# EAGLE board SmartLEDShield_ESP32_THT_V0 (EAGLE 8.6.3)
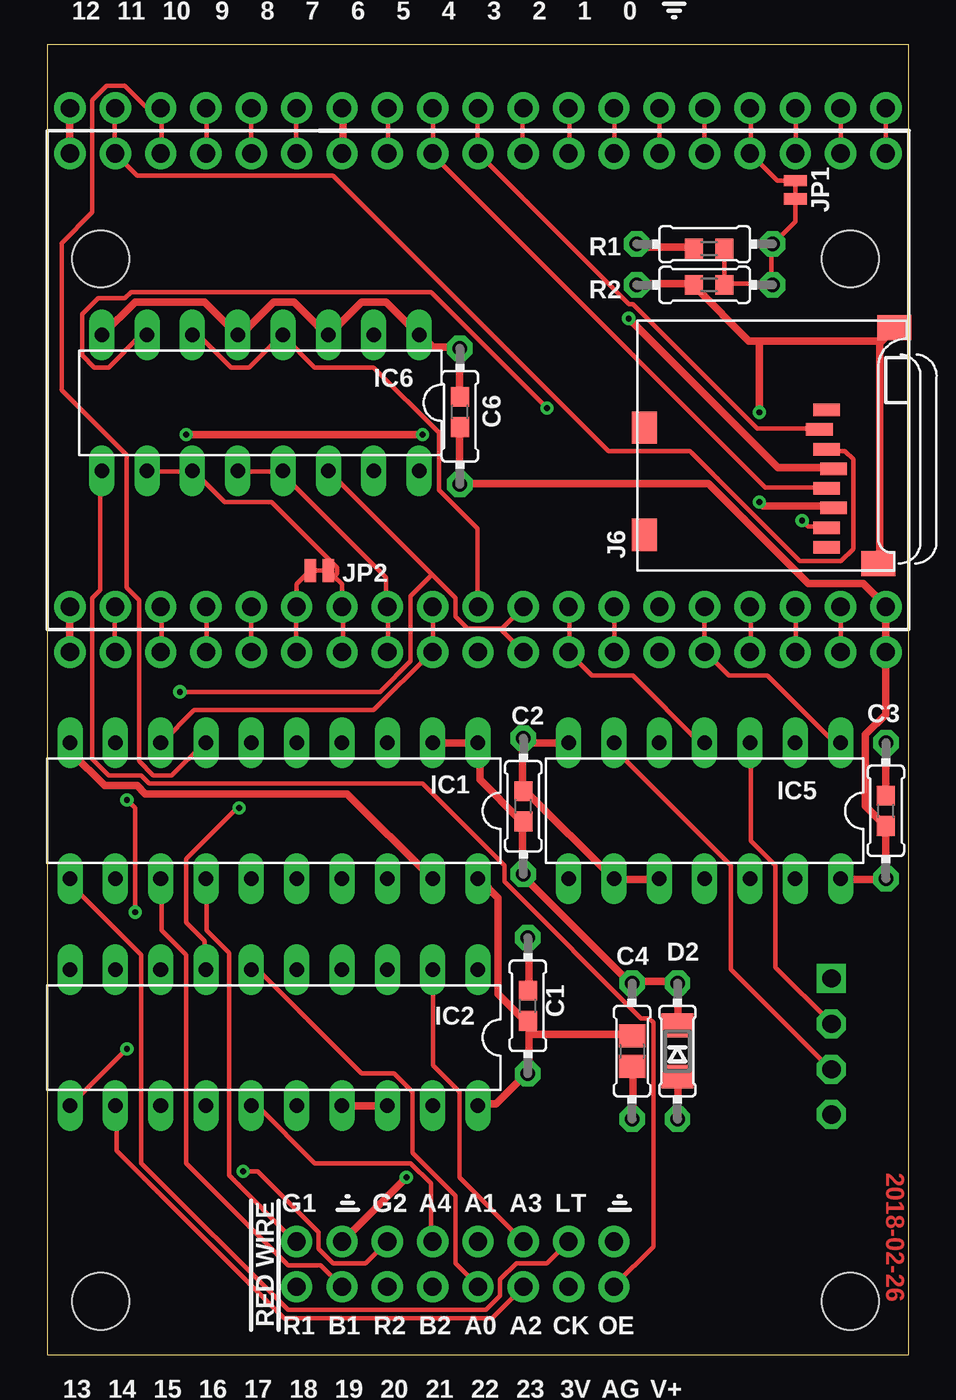
[diagram p0: board, top side]
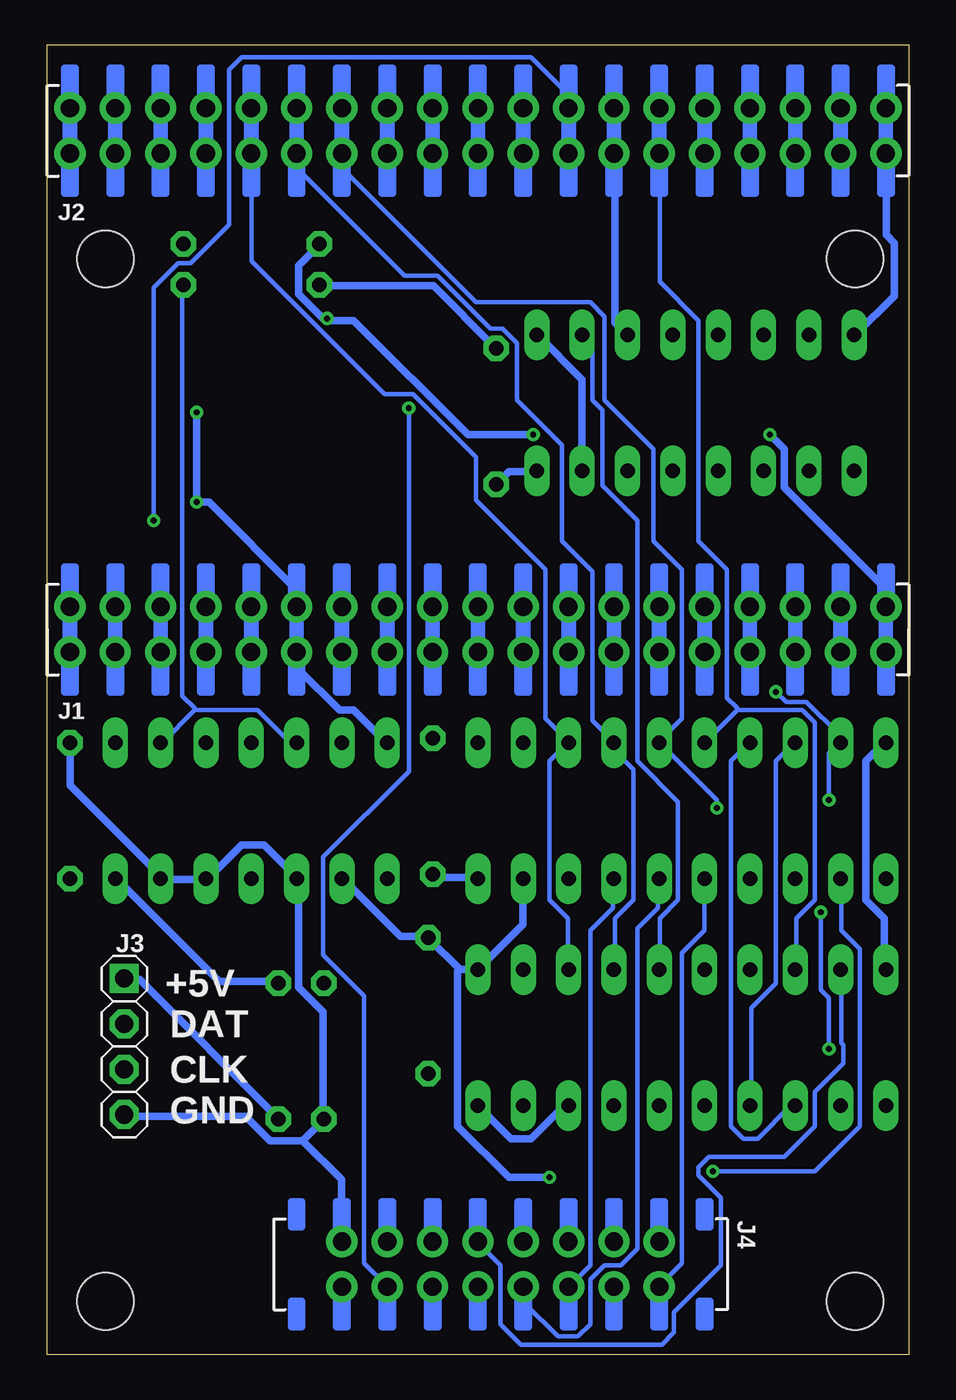
[diagram p1: board, bottom side, seen from below]

Size 48.26 x 73.41 mm. Coordinates in mm from the lower left corner, seen from the top.
Outline: 0,0 48.26,0 48.26,73.41 0,73.41 0,0
Copper layers (1*16): Top 0.0356mm / dielectric 1.5011mm / Bottom 0.0356mm
Design rules "OshParkMod-8mil-20150316": minimum track width 6mil, minimum drill 13mil, track to track 8mil, track to pad 8mil, pad to pad 8mil, via to via 8mil, smd to smd 8mil, copper to edge 15mil, drill to drill 6mil, minimum pad ring 12mil, minimum via ring 8mil, stop-mask expansion 3mil, vias tented up to drill 25mil, thermal gap 10mil
Net classes: 0 default: width 0.254 mm; 1 power: width 0.406 mm

## Footprints (pad centres in the part's own frame; a part is rotated, then mirrored left to right if it is on the bottom)
C0603 = smd 1.1 x 1: 1 -0.85,0; 2 0.85,0
0204/7 = drill 0.813 octagon: 1 -3.81,0; 2 3.81,0
C0805 = smd 1.3 x 1.5: 1 -0.85,0; 2 0.85,0
SOD123-FL = smd 1.34 x 1.8: A 1.43,0; C -1.43,0
STAND-OFF-3MM = hole 3.2: 0,0
DIL20 = drill 0.813 long: 1 -11.43,-3.81; 2 -8.89,-3.81; 3 -6.35,-3.81; 4 -3.81,-3.81; 5 -1.27,-3.81; 6 1.27,-3.81; 7 3.81,-3.81; 8 6.35,-3.81; 9 8.89,-3.81; 10 11.43,-3.81; 11 11.43,3.81; 12 8.89,3.81; 13 6.35,3.81; 14 3.81,3.81; 15 1.27,3.81; 16 -1.27,3.81; 17 -3.81,3.81; 18 -6.35,3.81; 19 -8.89,3.81; 20 -11.43,3.81
DIL14 = drill 0.813 long: 1 -7.62,-3.81; 2 -5.08,-3.81; 3 -2.54,-3.81; 4 0,-3.81; 5 2.54,-3.81; 6 5.08,-3.81; 7 7.62,-3.81; 8 7.62,3.81; 9 5.08,3.81; 10 2.54,3.81; 11 0,3.81; 12 -2.54,3.81; 13 -5.08,3.81; 14 -7.62,3.81
DIL16 = drill 0.813 long: 1 -8.89,-3.81; 2 -6.35,-3.81; 3 -3.81,-3.81; 4 -1.27,-3.81; 5 1.27,-3.81; 6 3.81,-3.81; 7 6.35,-3.81; 8 8.89,-3.81; 9 8.89,3.81; 10 6.35,3.81; 11 3.81,3.81; 12 1.27,3.81; 13 -1.27,3.81; 14 -3.81,3.81; 15 -6.35,3.81; 16 -8.89,3.81
ESP32_DEVC_DUAL_HEADER_BOT_MOUNT_RIGHT = drill 1.016 pad 1.753: 3V3A -1.27,-24.13; 3V3B 1.27,-24.13; 5V_A -1.27,21.59; 5V_B 1.27,21.59; 12A -1.27,6.35; 12B 1.27,6.35; 13A_A -1.27,11.43; 13B_B 1.27,11.43; 14A_A -1.27,3.81; 14B_B 1.27,3.81; 25A -1.27,-3.81; 25B 1.27,-3.81; 26A -1.27,-1.27; 26B 1.27,-1.27; 27A -1.27,1.27; 27B 1.27,1.27; 32A -1.27,-8.89; 32B 1.27,-8.89; 33A -1.27,-6.35; 33B 1.27,-6.35; 34A -1.27,-13.97; 34B 1.27,-13.97; 35A -1.27,-11.43; 35B 1.27,-11.43; CMD_A -1.27,19.05; CMD_B 1.27,19.05; D2A -1.27,13.97; D2B 1.27,13.97; D3_A -1.27,16.51; D3_B 1.27,16.51; ENA -1.27,-21.59; ENB 1.27,-21.59; GNDA -1.27,8.89; GNDB 1.27,8.89; VNA -1.27,-16.51; VNB 1.27,-16.51; VPA -1.27,-19.05; VPB 1.27,-19.05
ESP32_DEVC_DUAL_HEADER_BOT_MOUNT_LEFT = drill 1.016 pad 1.753: 0A 1.27,8.89; 0B -1.27,8.89; 2A 1.27,11.43; 2B -1.27,11.43; 4A 1.27,6.35; 4B -1.27,6.35; 5A 1.27,-1.27; 5B -1.27,-1.27; 15A_A 1.27,13.97; 15B_B -1.27,13.97; 16_B -1.27,3.81; 16A_A 1.27,3.81; 17A_A 1.27,1.27; 17B_B -1.27,1.27; 18A_A 1.27,-3.81; 18B_B -1.27,-3.81; 19A_A 1.27,-6.35; 19B_B -1.27,-6.35; 21A 1.27,-11.43; 21B -1.27,-11.43; 22A 1.27,-19.05; 22B -1.27,-19.05; 23A 1.27,-21.59; 23B -1.27,-21.59; CLKA 1.27,21.59; CLKB -1.27,21.59; D0A 1.27,19.05; D0B -1.27,19.05; D1A 1.27,16.51; D1B -1.27,16.51; GND1A 1.27,-24.13; GND1B -1.27,-24.13; GNDA 1.27,-8.89; GNDB -1.27,-8.89; RXA 1.27,-13.97; RXB -1.27,-13.97; TXA 1.27,-16.51; TXB -1.27,-16.51
1X04-S = drill 1.016 square: 1 -3.81,0 | drill 1.016 octagon: 2 -1.27,0; 3 1.27,0; 4 3.81,0
SMARTMATRIX_SSMTHT = drill 1.016 pad 1.753: 1 1.27,8.89; 2 -1.27,8.89; 3 1.27,6.35; 4 -1.27,6.35; 5 1.27,3.81; 6 -1.27,3.81; 7 1.27,1.27; 8 -1.27,1.27; 9 1.27,-1.27; 10 -1.27,-1.27; 11 1.27,-3.81; 12 -1.27,-3.81; 13 1.27,-6.35; 14 -1.27,-6.35; 15 1.27,-8.89; 16 -1.27,-8.89
MICROSD = smd 0.7 x 1.5: 1 9,-10.64; 2 7.9,-10.24; 3 6.8,-10.64; 4 5.7,-11.04; 5 4.6,-10.64; 6 3.5,-11.04; 7 2.4,-10.64; 8 1.3,-10.64 | smd 1.8 x 1.4: CD1 2,-0.44; CD2 8,-0.44 | smd 1.4 x 1.9: MT1 0.4,-13.54; MT2 13.6,-14.44
SMT-JUMPER_2_NC_TRACE_NO-SILK = smd 0.635 x 1.27: 1 -0.508,0; 2 0.508,0
R0603 = smd 1 x 1.1: 1 -0.85,0; 2 0.85,0

## Placement (x,y rotation side)
C1  0.1uF  [C0603]  26.92,19.56 90 top
C1-THT  47k  [0204/7]  26.92,19.56 90 top
C2  0.1uF  [C0603]  26.67,30.73 90 top
C2-THT  47k  [0204/7]  26.67,30.73 90 top
C3  0.1uF  [C0603]  46.99,30.48 90 top
C3-THT  47k  [0204/7]  46.99,30.48 90 top
C4  10uF  [C0805]  32.77,17.02 270 top
C4-THT  47k  [0204/7]  32.77,17.02 90 top
C6  0.1uF  [C0603]  23.11,52.83 90 top
C6-THT  47k  [0204/7]  23.11,52.58 90 top
D2  MBR1020VL  [SOD123-FL]  35.31,17.02 270 top
D2-THT  47k  [0204/7]  35.31,17.02 270 top
H1  STAND-OFFSTAND-OFF-3MM  [STAND-OFF-3MM]  45,61.4 90 top
H3  STAND-OFFSTAND-OFF-3MM  [STAND-OFF-3MM]  3,61.4 90 top
H6  STAND-OFFSTAND-OFF-3MM  [STAND-OFF-3MM]  3,3 270 top
H9  STAND-OFFSTAND-OFF-3MM  [STAND-OFF-3MM]  45,3 0 top
IC1  74LS245N  [DIL20]  12.7,30.48 180 top
IC2  74S373N  [DIL20]  12.7,17.78 180 top
IC5  74ALS08N  [DIL14]  36.83,30.48 180 top
IC6  74S253N  [DIL16]  11.94,53.34 180 top
J1  ESP32_DEVC_MIN_RIGHT  [ESP32_DEVC_DUAL_HEADER_BOT_MOUNT_RIGHT]  25.4,40.64 90 bottom
J2  ESP32_DEVC_MIN_LEFT  [ESP32_DEVC_DUAL_HEADER_BOT_MOUNT_LEFT]  25.4,68.58 90 bottom
J3  [1X04-S]  43.94,17.27 270 bottom
J4  [SMARTMATRIX_SSMTHT]  22.86,5.08 270 bottom
J6  MICROSD  [MICROSD]  33.02,43.94 90 top
JP1  JUMPER-SMT_2_NC_TRACE_NO-SILK  [SMT-JUMPER_2_NC_TRACE_NO-SILK]  41.91,65.28 270 top
JP2  JUMPER-SMT_2_NC_TRACE_NO-SILK  [SMT-JUMPER_2_NC_TRACE_NO-SILK]  15.24,43.94 180 top
R1  47k-DNP  [R0603]  37.08,61.98 0 top
R1-THT  47k-DNP  [0204/7]  36.83,62.23 0 top
R2  47k  [R0603]  37.08,59.94 180 top
R2-THT  47k  [0204/7]  36.83,59.94 180 top

## Library data of the parts
C1-C4 C6 = scanlime; PARTNO: CAP CER 0.1UF 10V 10% X7R 0805
C1-THT C2-THT C3-THT C4-THT C6-THT D2-THT R1 R1-THT R2 R2-THT = rcl
D2 H1 H3 H6 H9 IC1 IC2 J1-J4 = eclibrary
IC5 IC6 = 74xx-us
J6 = adafruit; PARTNO: 101-00660-68-6
JP1 JP2 = SparkFun-Jumpers

## Nets
3V3 [power]: J1.3V3A J1.3V3B J6.4 R1-THT.1 R1.1
APA_MISO: J1.12A J1.12B
APA_MOSI: IC5.1 J1.13A_A J1.13B_B
APA_SCK: IC5.4 J1.14A_A J1.14B_B
BUFFER_B1: IC1.7 IC2.13 J2.22A J2.22B
BUFFER_B2: IC1.4 IC2.4 J2.0A J2.0B
BUFFER_CLK: IC6.4 IC6.6 J1.26A J1.26B
BUFFER_G1: IC1.6 IC2.8 J2.21A J2.21B
BUFFER_G2: IC1.8 IC2.14 J1.25A J1.25B
BUFFER_LATCH: IC1.9 IC2.11 IC6.14 J1.27A J1.27B
BUFFER_R1: IC1.5 IC2.7 J2.4A J2.4B
BUFFER_R2: IC1.3 IC2.3 J2.2A J2.2B
CLK1: IC5.6 J3.3
DAT1: IC5.3 J3.2
GND [power]: C1-THT.2 C1.2 C2-THT.2 C2.2 C3-THT.2 C3.2 C4-THT.1 C4.2 C6-THT.2 C6.2 IC1.10 IC1.19 IC2.1 IC2.10 IC5.7 IC5.9 IC5.10 IC5.12 IC5.13 IC6.1 IC6.3 IC6.5 IC6.8 IC6.15 J1.GNDA J1.GNDB J2.GND1A J2.GND1B J2.GNDA J2.GNDB J3.4 J4.4 J4.16 J6.6 J6.MT1 J6.MT2 R2-THT.2 R2.2
LED_EN: J2.15A_A J2.15B_B JP1.1
N$1: J1.35A J1.35B JP2.2
N$2: J1.CMD_A J1.CMD_B
N$3: J1.D3_A J1.D3_B
N$4: IC5.2 IC5.5 JP1.2 R1-THT.2 R1.2 R2-THT.1 R2.1
N$5: J1.D2A J1.D2B
N$6: J2.CLKA J2.CLKB
N$7: J2.D0A J2.D0B
N$8: J2.D1A J2.D1B
N$9: J1.VNA J1.VNB
N$10: J1.VPA J1.VPB
N$11: J1.34A J1.34B
N$13: J1.ENA J1.ENB
N$14: J2.TXA J2.TXB
N$15: J2.RXA J2.RXB
N$16: J2.17A_A J2.17B_B
N$17: J2.16_B J2.16A_A
OE_DMA: IC6.10 IC6.11 J1.32A J1.32B JP2.1
OE_PWM: IC6.12 IC6.13 J1.33A J1.33B
OE_SWITCH: IC2.5 IC6.2
PANEL_ADX0: IC2.6 J4.9
PANEL_ADX1: IC2.9 J4.10
PANEL_ADX2: IC2.12 J4.11
PANEL_ADX3: IC2.2 J4.12
PANEL_ADX4: IC2.15 J4.8
PANEL_B1: IC1.13 J4.3
PANEL_B2: IC1.16 J4.7
PANEL_CLK: IC6.7 J4.13
PANEL_G1: IC1.14 J4.2
PANEL_G2: IC1.12 J4.6
PANEL_LATCH: IC1.11 J4.14
PANEL_OE: IC6.9 J4.15
PANEL_R1: IC1.15 J4.1
PANEL_R2: IC1.17 J4.5
SD_CS: J2.5A J2.5B J6.2
SD_MISO: J2.19A_A J2.19B_B J6.7
SD_MOSI: J2.23A J2.23B J6.3
SD_SCK: J2.18A_A J2.18B_B J6.5
VEXT [power]: D2-THT.2 D2.A J3.1
VIN [power]: C1-THT.1 C1.1 C2-THT.1 C2.1 C3-THT.1 C3.1 C4-THT.2 C4.1 C6-THT.1 C6.1 D2-THT.1 D2.C IC1.1 IC1.2 IC1.20 IC2.17 IC2.18 IC2.20 IC5.14 IC6.16 J1.5V_A J1.5V_B

## Tracks (layer width: path | path; a pad name or v marks a point on that pad's centre or on a via)
3V3  (via drill 0.33)
  Top 0.406: J1.3V3B 1.26,41.83 1.26,39.43 J1.3V3A | R1.1 36.23,62.06 33.15,62.06 33.03,62.18 R1-THT.1 | v32.58,58.06 40.92,49.72 44.01,49.72 J6.4 | v21.03,51.55 v7.77,51.55
  Bottom 0.406: R1-THT.1 33.03,62.18 34.18,61.04 34.18,59.44 32.8,58.06 v32.58,58.06 32.46,57.95 31.09,57.95 24.69,51.55 v21.03,51.55 | v7.77,51.55 6.97,50.75 6.97,48.58 1.37,42.98 1.37,41.95 J1.3V3B
APA_MISO
  Top 0.254: J1.12B 31.77,41.83 31.77,39.43 J1.12A
APA_MOSI
  Top 0.254: IC5.1 44.12,34.29 40.35,38.06 38.18,38.06 36.92,39.32 J1.13A_A 36.8,39.43 36.8,41.83 J1.13B_B
APA_SCK
  Top 0.254: IC5.4 36.58,34.29 32.8,38.06 30.52,38.06 J1.14A_A 29.26,39.43 29.26,41.83 J1.14B_B
BUFFER_B1
  Top 0.254: J2.22B 6.4,67.32 6.4,69.84 J2.22A 6.29,69.95 5.49,69.95 4.34,71.09 3.31,71.09 2.52,70.29 2.52,64.01 0.8,62.29 0.8,54.06 4.46,50.41 4.46,42.98 5.14,42.29 5.14,33.26 5.94,32.46 6.97,32.46 8.8,34.29 IC1.7
  Bottom 0.254: IC2.13 6.4,13.95 6.63,13.95 8.46,12.12 9.26,12.12 9.94,12.8 9.94,33.26 8.91,34.29 IC1.7
BUFFER_B2
  Top 0.254: J2.0B J2.0A
  Bottom 0.254: IC2.4 16.46,21.6 16.46,24.46 15.43,25.49 15.43,32.8 16.46,33.83 16.46,34.29 IC1.4 16.57,34.4 17.72,35.55 17.72,43.89 19.43,45.61 19.43,50.98 21.95,53.49 21.95,56.69 22.75,57.49 23.43,57.49 26.4,60.47 28.23,60.47 34.29,66.52 J2.0B
BUFFER_CLK
  Top 0.254: IC6.6 8.46,57.15 10.29,55.32 11.32,55.32 13.14,57.15 IC6.4 13.26,57.04 14.97,55.32 18.29,55.32 21.95,51.66 21.95,48.46 24.12,46.29 24.12,41.95 J1.26B
  Bottom 0.254: J1.26B 24.12,41.83 24.12,39.43 J1.26A
BUFFER_G1
  Top 0.254: J2.21A 13.95,69.84 13.95,67.32 J2.21B
  Bottom 0.254: 9.6,36.12 5.94,36.12 5.26,35.43 5.26,25.49 6.29,24.46 6.29,21.6 IC2.8 | IC1.6 9.6,36.12 | J2.21B 13.95,67.21 13.95,60.12 11.77,57.95 11.77,45.61 10.17,44.01 10.17,36.8 9.6,36.23 9.6,36.12
BUFFER_G2
  Top 0.254: J1.25B 21.6,41.83 21.6,39.43 J1.25A 21.49,39.32 18.29,36.12 8.23,36.12 6.4,34.29 IC1.8
  Bottom 0.254: IC2.14 8.8,14.06 8.8,19.43 7.43,20.8 7.43,33.26 6.4,34.29 IC1.8
BUFFER_LATCH  (via drill 0.33)
  Top 0.254: 21.55,43.72 22.86,42.41 22.86,41.38 23.55,40.69 25.49,40.69 | 21.55,43.72 15.77,49.49 IC6.14 | 25.49,40.69 26.63,41.83 J1.27B | J1.27A 26.63,39.43 25.49,40.58 25.49,40.69 | v4.46,17.14 1.37,14.06 IC2.11 | v4.92,24.8 4.92,30.63 v4.46,31.09 | 21.55,43.72 20.34,42.52 20.34,38.86 18.63,37.15 v7.43,37.15
  Bottom 0.254: v4.46,17.14 4.46,20 4.92,20.46 v4.92,24.8 | v4.46,31.09 4.46,33.72 3.89,34.29 IC1.9 3.89,34.4 3.89,34.75 5.71,36.58 6.86,36.58 v7.43,37.15
BUFFER_R1  (via drill 0.33)
  Top 0.254: J2.4A 31.77,69.84 31.77,67.32 J2.4B | v10.74,30.63 10.63,30.63 7.77,27.77 7.77,24.23 8.8,23.2 8.8,21.6 IC2.7
  Bottom 0.254: v10.74,30.63 10.74,31.09 13.95,34.29 IC1.5 13.95,34.4 12.69,35.66 12.69,44.01 14.29,45.61 14.29,50.75 17.03,53.49 17.03,58.18 17.83,58.98 24.23,58.98 31.66,66.41 31.66,67.21 J2.4B
BUFFER_R2
  Top 0.254: J2.2A 36.8,69.84 36.8,67.32 J2.2B
  Bottom 0.254: IC2.3 19.09,21.6 19.09,24.46 20.12,25.49 20.12,33.26 19.09,34.29 IC1.3 19.09,34.4 20.34,35.66 20.34,44.01 24.23,47.89 24.23,50.29 27.77,53.84 29.38,53.84 36.8,61.27 36.8,67.21 J2.2B
CLK1
  Top 0.254: IC5.6 31.77,34.29 31.77,33.95 38.29,27.43 38.29,21.6 43.89,16 J3.3
DAT1
  Top 0.254: IC5.3 39.43,34.29 39.43,28.8 40.8,27.43 40.8,21.72 43.89,18.63 J3.2
GND  (via drill 0.33)
  Top 0.406: J2.GNDA 16.57,69.84 16.57,67.32 J2.GNDB | J2.GND1A 1.26,69.84 1.26,67.32 J2.GND1B | IC6.8 3.09,57.15 4.92,58.98 8.8,58.98 10.63,57.15 IC6.5 10.86,57.15 12.69,58.98 13.83,58.98 15.66,57.15 IC6.3 15.89,57.26 17.6,58.98 18.97,58.98 20.69,57.26 IC6.1 20.92,57.15 21.6,56.46 22.97,56.46 C6-THT.2 23.09,56.35 23.09,53.72 C6.2 | 46.63,56.69 46.63,44.35 J6.MT1 | 46.63,56.69 47.43,57.49 J6.MT2 | R2-THT.2 33.03,60.01 36.23,60.01 R2.2 36.35,59.78 39.32,56.81 39.89,56.81 | 39.89,56.81 46.52,56.81 46.63,56.69 | C4.2 32.8,16.12 32.8,13.26 C4-THT.1 | C3.2 46.98,31.43 46.98,34.29 C3-THT.2 | v39.89,47.78 40.12,47.55 44.01,47.55 J6.6 | IC5.7 26.75,34.29 C2-THT.2 26.63,34.52 26.63,31.66 C2.2 26.86,31.55 31.66,26.75 IC5.9 31.77,26.63 34.29,26.63 IC5.10 | C1.2 26.98,20.46 26.98,23.32 C1-THT.2 | v20.12,9.94 16.57,6.4 J4.4 | IC1.10 1.37,34.29 1.37,33.72 3.2,31.89 5.03,31.89 5.49,31.43 16.8,31.43 21.49,26.75 IC1.19 | v39.89,52.81 39.89,56.81
  Bottom 0.406: J2.GND1B 1.26,67.21 1.26,62.75 0.8,62.29 0.8,59.32 2.97,57.15 IC6.8 | J2.GNDB 16.46,67.21 16.46,57.84 15.77,57.15 IC6.3 | IC6.15 18.29,54.63 20.8,57.15 IC6.1 | R2-THT.2 32.92,59.89 26.63,59.89 23.2,56.46 C6-THT.2 | 33.95,12 35.78,12 37.15,13.37 43.89,13.37 J3.4 | 33.95,12 32.8,13.14 C4-THT.1 32.8,13.37 32.8,19.2 34.18,20.57 34.18,26.52 IC5.10 34.29,26.75 36.12,28.57 37.38,28.57 39.2,26.75 IC5.12 39.43,26.63 41.83,26.63 IC5.13 41.95,26.86 46.98,31.89 46.98,34.29 C3-THT.2 | 33.95,12 31.77,9.83 31.77,6.4 J4.16 | IC2.10 1.37,21.6 1.37,24.46 2.4,25.49 2.4,33.26 1.37,34.29 IC1.10 | 25.15,21.6 24.23,21.6 IC2.1 21.6,24.12 21.6,26.63 IC1.19 | 25.15,21.6 26.86,23.32 C1-THT.2 27.09,23.43 28.46,23.43 31.66,26.63 IC5.9 | v20.12,9.94 22.4,9.94 25.26,12.8 25.26,21.49 25.15,21.6 | IC5.7 29.26,34.29 31.09,36.12 31.89,36.12 34.18,38.41 34.18,39.2 J1.GNDA J1.GNDB 34.29,42.86 39.2,47.78 v39.89,47.78 v39.89,52.81
LED_EN
  Top 0.254: JP1.1 40.89,65.79 J2.15B_B 39.43,67.32 39.43,69.84 J2.15A_A
N$1
  Top 0.254: JP2.2 13.97,43.18 J1.35B 13.95,41.83 13.95,39.43 J1.35A
N$2
  Top 0.254: J1.CMD_B 44.46,41.83 44.46,39.43 J1.CMD_A
N$3
  Top 0.254: J1.D3_B 41.95,41.83 41.95,39.43 J1.D3_A
N$4
  Top 0.254: JP1.2 41.91,63.5 R1-THT.2 40.58,62.18 40.58,60.12 R2-THT.1 40.58,60.01 38.06,60.01 R2.1 37.95,60.01 37.95,61.95 R1.2
  Bottom 0.254: IC5.5 34.63,34.29 36.46,36.12 40.01,36.12 | 40.01,36.12 41.83,34.29 IC5.2 | R2-THT.1 40.69,59.89 40.69,36.92 40.01,36.23 40.01,36.12
N$5
  Top 0.254: J1.D2B 39.43,41.83 39.43,39.43 J1.D2A
N$6
  Top 0.254: J2.CLKA 46.98,69.84 46.98,67.32 J2.CLKB
N$7
  Top 0.254: J2.D0A 44.46,69.84 44.46,67.32 J2.D0B
N$8
  Top 0.254: J2.D1A 41.95,69.84 41.95,67.32 J2.D1B
N$9
  Top 0.254: J1.VNB 8.91,41.83 8.91,39.43 J1.VNA
N$10
  Top 0.254: J1.VPB 6.4,41.83 6.4,39.43 J1.VPA
N$11
  Top 0.254: J1.34A J1.34B
N$13
  Top 0.254: J1.ENB 3.77,41.83 3.77,39.43 J1.ENA
N$14
  Top 0.254: J2.TXA 8.91,69.84 8.91,67.32 J2.TXB
N$15
  Top 0.254: J2.RXB J2.RXA
N$16
  Top 0.254: J2.17A_A 26.63,69.84 26.63,67.32 J2.17B_B
N$17
  Top 0.254: J2.16A_A 29.26,69.84 29.26,67.32 J2.16_B
OE_DMA
  Top 0.254: JP2.1 16.07,43.62 | 16.07,43.62 16.51,43.18 J1.32B 16.57,41.83 16.57,39.43 J1.32A | IC6.10 5.6,49.49 8.12,49.49 IC6.11 8.23,49.49 9.94,47.78 12.57,47.78 16.23,44.12 16.23,43.78 16.07,43.62
OE_PWM
  Top 0.254: J1.33A 19.09,39.43 19.09,41.83 J1.33B 18.97,41.95 18.97,43.55 13.14,49.38 IC6.13 13.14,49.49 10.74,49.49 IC6.12
OE_SWITCH
  Bottom 0.254: IC6.2 17.72,56.58 17.72,53.49 17.14,52.92 17.14,48.69 15.2,46.75 15.2,33.26 12.92,30.98 12.92,25.49 13.95,24.46 13.95,21.6 IC2.5
PANEL_ADX0
  Top 0.254: IC2.6 11.43,21.49 11.89,21.49 17.6,15.77 19.43,15.77 20.46,14.74 20.46,11.32 22.86,8.91 22.86,5.14 24.12,3.89 J4.9
PANEL_ADX1
  Bottom 0.254: IC2.9 3.77,21.49 3.77,17.49 3.66,17.37 3.66,16.34 5.26,14.74 5.26,12.8 6.97,11.09 11.2,11.09 11.77,10.52 11.77,10.06 10.52,8.8 10.52,5.03 13.14,2.4 13.14,1.26 13.83,0.57 21.72,0.57 22.86,1.71 22.86,5.03 24.12,6.29 J4.10
PANEL_ADX2
  Top 0.254: J4.11 24.92,2.06 13.26,2.06 3.89,11.43 3.89,13.95 IC2.12
PANEL_ADX3
  Top 0.254: IC2.2 21.6,21.49 21.6,16.23 23.09,14.74 23.09,9.94 26.63,6.4 J4.12
PANEL_ADX4
  Top 0.254: IC2.15 11.43,13.95 11.77,13.95 14.97,10.74 20.34,10.74 21.49,9.6 21.49,6.4 J4.8
PANEL_B1
  Top 0.254: IC1.13 6.4,26.63 6.4,23.77 7.77,22.4 7.77,10.74 13.49,5.03 15.32,5.03 16.46,3.89 J4.3
PANEL_B2
  Bottom 0.254: IC1.16 14.06,26.63 14.06,25.03 15.2,23.89 15.2,5.94 16.12,5.03 17.03,5.03 17.83,4.23 17.83,1.71 18.52,1.03 19.66,1.03 21.49,2.86 21.49,3.77 J4.7
PANEL_CLK  (via drill 0.33)
  Top 0.254: IC6.7 5.26,57.15 3.43,55.32 2.63,55.32 1.94,56.01 1.94,58.29 2.86,59.21 4.34,59.21 4.69,59.55 21.49,59.55 v28,53.03
  Bottom 0.254: v28,53.03 28,32.69 32.8,27.89 32.8,22.4 30.52,20.12 30.52,5.14 29.26,3.89 J4.13
PANEL_G1
  Top 0.254: IC1.14 8.91,26.63 8.91,23.77 10.17,22.52 10.17,10.06 13.95,6.29 J4.2
PANEL_G2  (via drill 0.33)
  Top 0.254: v10.97,10.29 11.77,10.29 15.2,6.86 15.2,5.94 16,5.14 17.83,5.14 18.97,6.29 J4.6
  Bottom 0.254: v10.97,10.29 5.26,10.29 2.74,12.8 2.74,22.75 3.77,23.77 3.77,26.63 IC1.12
PANEL_LATCH
  Top 0.254: J4.14 28,5.14 26.29,5.14 25.38,4.23 25.38,3.31 24.57,2.52 13.49,2.52 5.26,10.74 5.26,22.4 1.37,26.29 1.37,26.63 IC1.11
PANEL_OE
  Top 0.254: IC6.9 2.97,49.49 2.97,42.86 2.52,42.41 2.52,33.38 3.43,32.46 5.26,32.46 5.71,32 21.03,32 25.6,27.43 25.6,26.52 33.26,18.86 33.72,18.86 33.95,18.63 33.95,6.06 31.77,3.89 J4.15
PANEL_R1
  Bottom 0.254: IC1.15 11.43,23.77 12.69,22.52 12.69,5.14 13.95,3.89 J4.1
PANEL_R2
  Bottom 0.254: J4.5 17.83,5.03 17.83,23.77 16.57,25.03 16.57,26.63 IC1.17
SD_CS
  Top 0.254: J6.2 43.2,51.89 39.78,51.89 32.8,58.86 32.58,58.86 J2.5B 24.12,67.32 24.12,69.84 J2.5A
SD_MISO  (via drill 0.33)
  Top 0.254: v42.29,46.75 42.63,46.41 43.55,46.41 J6.7 | J2.19B_B 19.09,67.32 19.09,69.84 J2.19A_A
  Bottom 0.254: v42.29,46.75 42.29,59.78 40.92,61.15 40.23,61.15 38.06,63.32 38.06,72.01 37.38,72.69 21.14,72.69 19.09,70.64 19.09,69.95 J2.19A_A
SD_MOSI
  Top 0.254: J6.3 43.66,50.63 44.69,50.63 45.15,50.18 45.15,45.15 44.46,44.46 42.18,44.46 36.01,50.63 31.43,50.63 16,66.06 5.03,66.06 3.89,67.21 J2.23B 3.77,67.44 3.77,69.84 J2.23A
SD_SCK
  Top 0.254: J6.5 43.55,48.58 40.23,48.58 21.6,67.21 J2.18B_B 21.6,67.44 21.6,69.84 J2.18A_A
VEXT
  Top 0.406: D2.A 35.32,15.54 35.32,13.26 D2-THT.2
  Bottom 0.406: J3.1 43.89,21.03 43.09,21.03 35.32,13.26 D2-THT.2
VIN
  Top 0.406: IC2.17 16.57,13.95 18.97,13.95 IC2.18 | 26.98,17.95 26.98,15.77 C1-THT.1 26.75,15.66 25.15,14.06 24.23,14.06 IC2.20 | 26.98,17.95 26.98,18.63 C1.1 26.75,18.75 25.26,20.23 25.26,25.6 24.23,26.63 IC1.20 | 26.98,17.95 32.69,17.95 C4.1 | D2.C 35.32,18.52 35.32,20.8 D2-THT.1 35.2,20.92 32.8,20.92 C4-THT.2 32.69,21.03 32.46,21.03 26.75,26.75 C2-THT.1 26.63,26.98 26.63,29.83 C2.1 26.52,29.95 24.23,32.23 24.23,34.18 IC1.1 IC1.2 | C6.1 23.09,51.89 23.09,48.81 C6-THT.1 23.32,48.81 37.03,48.81 42.63,43.2 45.72,43.2 46.86,42.06 J1.5V_B 46.98,41.83 46.98,39.43 J1.5V_A 46.98,39.2 46.98,35.89 45.83,34.75 45.83,30.75 46.86,29.72 C3.1 46.98,29.6 46.98,26.75 C3-THT.1 46.86,26.63 44.46,26.63 IC5.14
  Bottom 0.406: IC2.18 19.09,13.95 19.32,13.95 21.14,12.12 22.29,12.12 24.12,13.95 IC2.20 | IC1.20 24.23,26.75 26.52,26.75 26.63,26.86 C2-THT.1 | IC6.16 20.92,49.49 22.4,49.49 23.09,48.81 C6-THT.1 | D2-THT.1 35.32,20.92 38.63,20.92 44.35,26.63 IC5.14

## Text on the board
Top: 2018-02-26
tPlace: 12 | 11 | 10 | 9 | 8 | 7 | 6 | 5 | 4 | 3 | 2 | 1 | 0 | pixl.mx/ / smkit12 | SmartLED / Shield / Teensy | V4 | for | G1 | G2 | G2 | A4 | A1 | A3 | LT | RED WIRE | R1 | B1 | R2 | B2 | A0 | A2 | CK | OE | 13 | 14 | 15 | 16 | 17 | 18 | 19 | 20 | 21 | 22 | 23 | 3V | AG | V+
bPlace: +5V | DAT | CLK | GND
Document: SmartLED Shield for Teensy | Rev V4 | Pixelmatix 2017 CC BY-SA